# EAGLE board batteryBalancer (EAGLE 8.4.0)
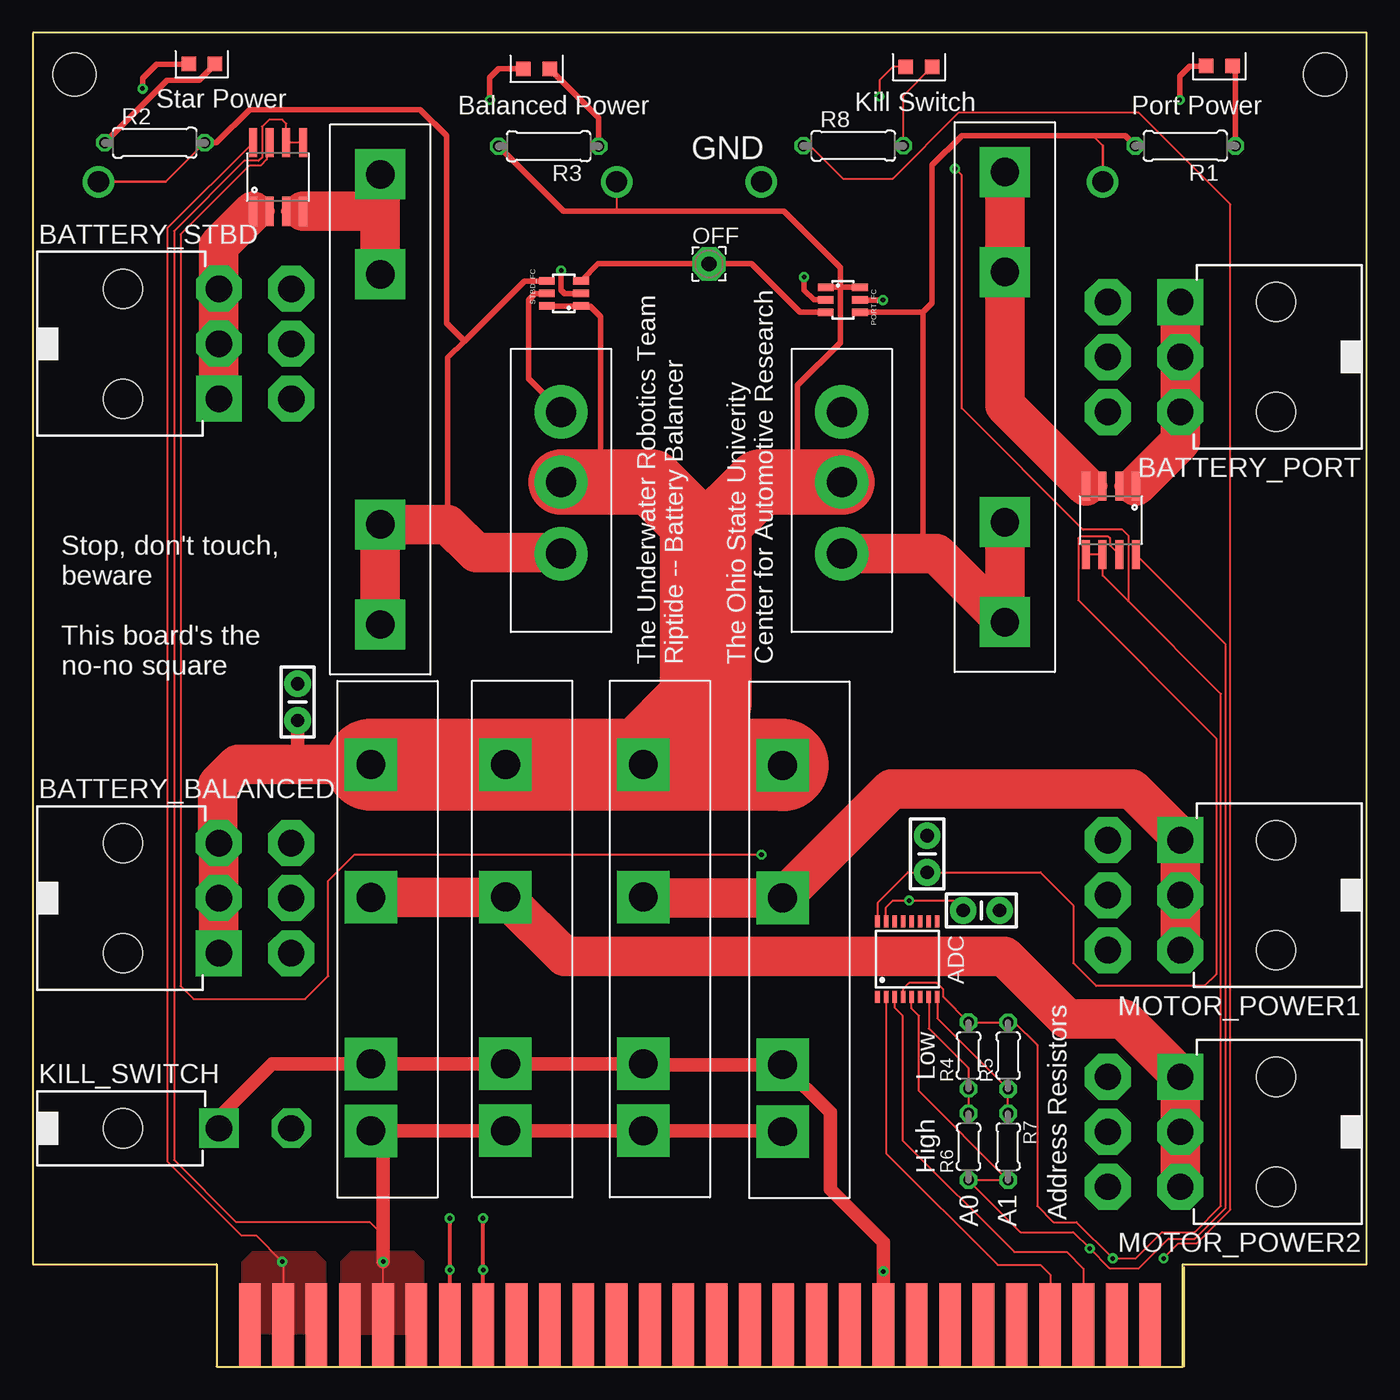
[diagram p0: board, top side]
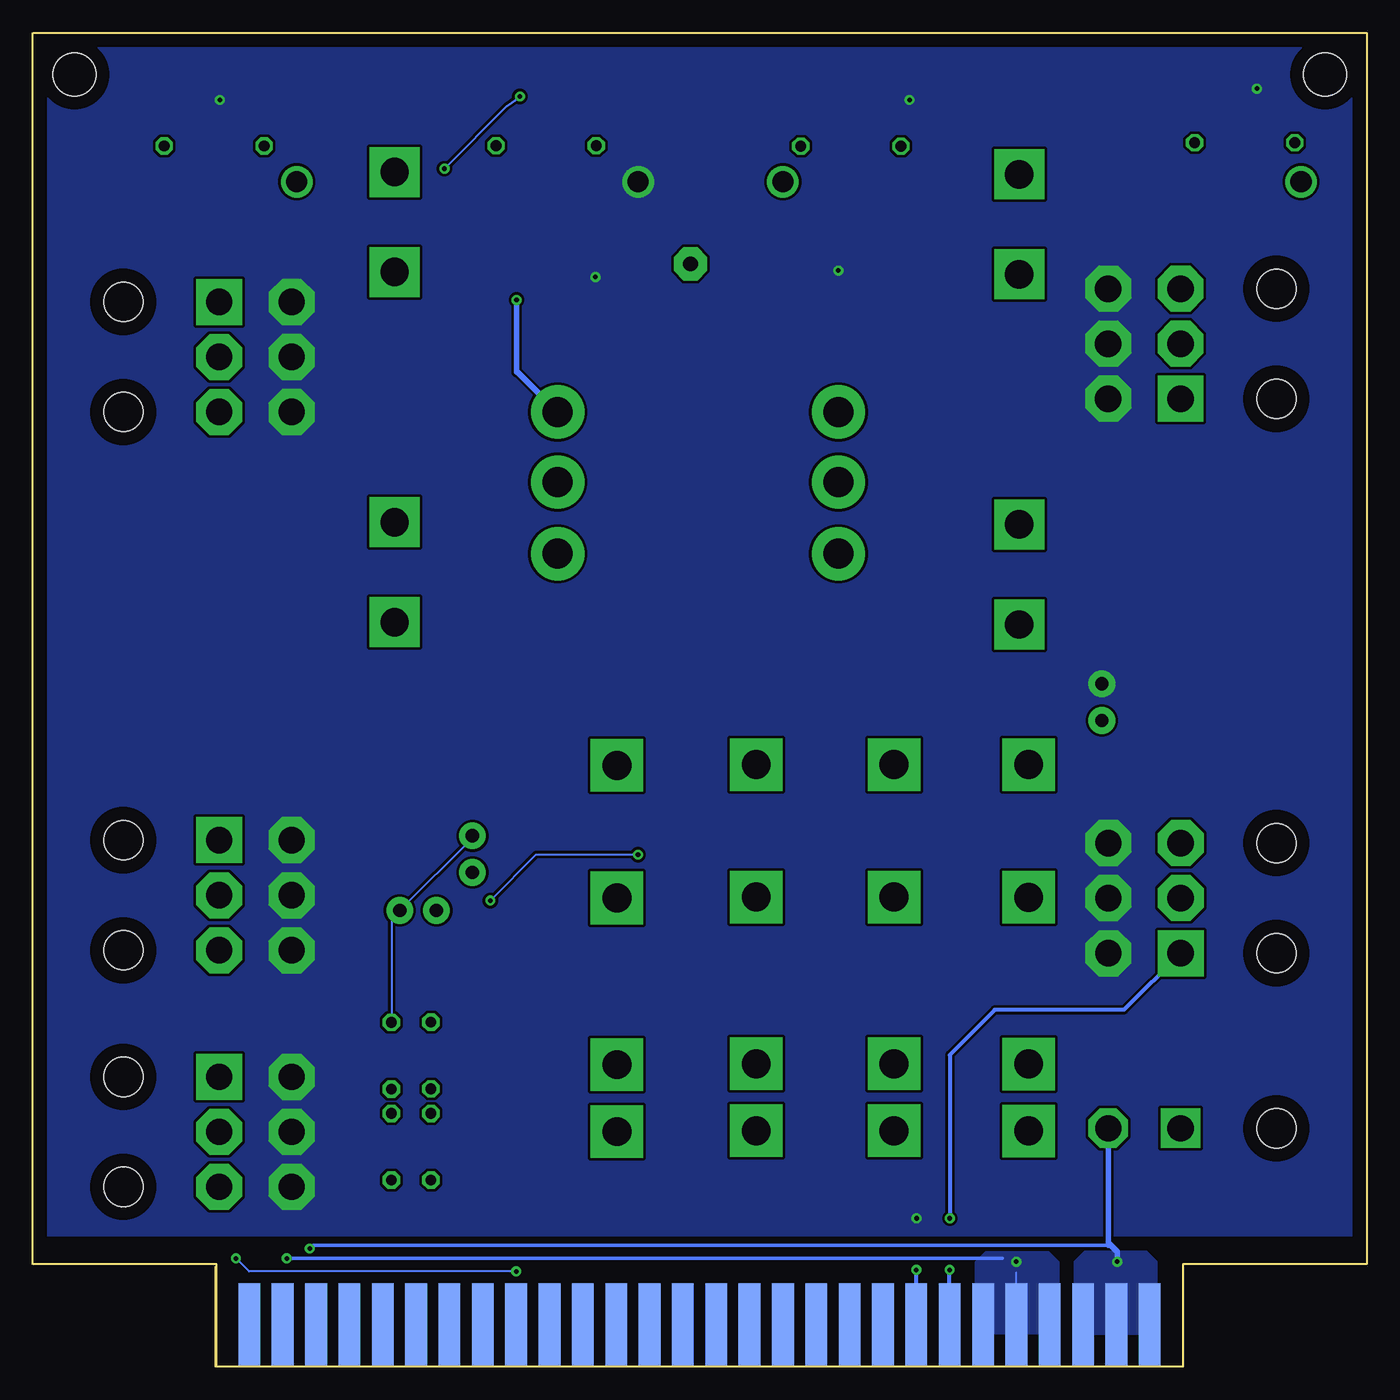
[diagram p1: board, bottom side, seen from below]

Size 101.6 x 101.6 mm. Coordinates in mm from the lower left corner, seen from the top.
Outline: 14,0 87.6,0 87.6,7.8 101.6,7.8 101.6,101.6 0,101.6 0,7.8 14,7.8 14,0
Copper layers (1*16): Top 0.035mm / dielectric 1.5mm / Bottom 0.035mm
Design rules "battery_balancer": minimum track width 6mil, minimum drill 0.35mm, track to track 0.205mm, track to pad 0.205mm, pad to pad 0.205mm, via to via 0.205mm, smd to smd 6mil, copper to edge 40mil, drill to drill 6mil, minimum pad ring 10mil, minimum via ring 8mil, stop-mask expansion 4mil, vias tented up to drill 0mil, thermal gap 10mil
Holes 3.26 mm at 3.17,98.42 98.42,98.42

## Footprints (pad centres in the part's own frame; a part is rotated, then mirrored left to right if it is on the bottom)
TSSOP-16 = smd 0.9 x 0.35: A0 -2.875,-1.625; A1 -2.875,-2.275; GND -2.875,0.325; IN0 2.875,2.275; IN1 2.875,1.625; IN2 2.875,0.975; IN3 2.875,0.325; IN4 2.875,-0.325; IN5 2.875,-0.975; IN6 2.875,-1.625; IN7 2.875,-2.275; INT -2.875,-0.975; SCL -2.875,0.975; SDA -2.875,1.625; V+ -2.875,-0.325; VREF -2.875,2.275
LTST-S270GKT = smd 1.1 x 1.1: ANODE 1,0; CATHODE -1,0
39-30-?06? = drill 2 pad 3.5 square: 1 4.191,0 | drill 2 pad 3.5 octagon: 2 0,0; 3 -4.191,0; 4 4.191,5.512; 5 0,5.512; 6 -4.191,5.512 | hole 3: -4.191,-7.3; 4.191,-7.3
CAP-PTH-SMALL-KIT = drill 1.016 pad 2.032: 1 -1.397,0; 2 1.397,0
5530843-6-BOARDFINGERS = smd 1.651 x 6.35 bottom: 3.3V_4 0.826,3.175; 3.3V_5 3.365,3.175; 3.3V_6 5.905,3.175; EXTRA1 16.066,3.175; EXTRA2 18.605,3.175; EXTRA3 21.145,3.175; EXTRA4 23.686,3.175; EXTRA5 26.226,3.175; EXTRA6 28.765,3.175; EXTRA7 31.305,3.175; EXTRA8 33.846,3.175; EXTRA9 36.386,3.175; EXTRA10 38.925,3.175; EXTRA11 41.465,3.175; EXTRA12 44.005,3.175; EXTRA13 46.545,3.175; EXTRA14 49.086,3.175; EXTRA15 51.626,3.175; EXTRA16 54.166,3.175; EXTRA17 56.706,3.175; EXTRA18 59.245,3.175; EXTRA19 61.785,3.175; EXTRA20 64.326,3.175; EXTRA21 66.865,3.175; EXTRA22 69.406,3.175; GND_4 8.445,3.175; GND_5 10.986,3.175; GND_6 13.525,3.175 | smd 1.651 x 6.35: 3.3VP1 0.826,3.175; 3.3VP2 3.365,3.175; 3.3VP3 5.905,3.175; CAN_H 51.626,3.175; CAN_L 54.166,3.175; EXTRA23 16.066,3.175; EXTRA24 18.605,3.175; EXTRA25 21.145,3.175; EXTRA26 23.686,3.175; EXTRA27 26.226,3.175; EXTRA28 28.765,3.175; EXTRA29 31.305,3.175; EXTRA30 33.846,3.175; EXTRA31 36.386,3.175; EXTRA32 38.925,3.175; EXTRA33 41.465,3.175; EXTRA34 44.005,3.175; EXTRA35 46.545,3.175; GND1 8.445,3.175; GND2 10.986,3.175; GND3 13.525,3.175; KILL_SWITCH 49.086,3.175; SCL_DEPTH 59.245,3.175; SCL_ESC 69.406,3.175; SCL_SENSOR 64.326,3.175; SDA_DEPTH 56.706,3.175; SDA_ESC 66.865,3.175; SDA_SENSOR 61.785,3.175
39-30-?02? = drill 2 pad 3 square: 1 0,0 | drill 2 pad 3 octagon: 2 0,5.512 | hole 3: 0,-7.3
2,54/1,1 = drill 1.118 pad 2.54 octagon: 1 0,0
SOIC-8 = smd 0.61 x 2.21: BW_SEL 0.635,2.616; GND 1.905,2.616; IP+1 -1.905,-2.616; IP+2 -0.635,-2.616; IP-1 0.635,-2.616; IP-2 1.905,-2.616; VCC -1.905,2.616; VIOUT -0.635,2.616
SOT23-6 = smd 0.55 x 1.2: 1 -0.95,-1.3; 2 0,-1.3; 3 0.95,-1.3; 4 0.95,1.3; 5 0,1.3; 6 -0.95,1.3
IXFX64N60P3 = drill 2.286 pad 4.064: DRAIN -1.27,0; GATE -6.604,0; SOURCE 4.191,0
01220083Z = drill 2.159 pad 3.81 square: P$1 -16.51,0; P$2 -8.89,0; P$3 10.16,0; P$4 17.78,0
0207/7 = drill 0.813 octagon: 1 -3.81,0; 2 3.81,0
0204/5 = drill 0.813 octagon: 1 -2.54,0; 2 2.54,0
CMX60D20 = drill 2.2 pad 4 square: CONTROL+ -8.87,0; CONTROL- -13.97,0; LOAD+ 13.93,0; LOAD- 3.83,0
5010_C = drill 1.6 pad 2.286: P$1 0,0

## Placement (x,y rotation side)
ADC  ADC128D818  [TSSOP-16]  66.61,31.04 90 top
BALANCED_STATUS  LTST-S270GKT  [LTST-S270GKT]  38.38,98.86 0 top
BATTERY_BALANCED  39-30-06?  [39-30-?06?]  14.17,35.69 270 top
BATTERY_PORT  39-30-06?  [39-30-?06?]  87.4,76.91 90 top
BATTERY_STBD  39-30-06?  [39-30-?06?]  14.18,77.91 270 top
C1  22uF  [CAP-PTH-SMALL-KIT]  20.18,50.61 270 top
C2  0.1uF  [CAP-PTH-SMALL-KIT]  72.25,34.75 0 top
C3  0.1uF  [CAP-PTH-SMALL-KIT]  68.11,39.04 90 top
EDGE_CONNECTOR  5530843  [5530843-6-BOARDFINGERS]  15.7,0 0 top
KILL_STATUS  LTST-S270GKT  [LTST-S270GKT]  67.5,99 0 top
KILL_SWITCH  39-30-02?  [39-30-?02?]  14.17,18.16 270 top
MOTOR_POWER1  39-30-06?  [39-30-?06?]  87.4,35.91 90 top
MOTOR_POWER2  39-30-06?  [39-30-?06?]  87.4,17.89 90 top
OFF  [2,54/1,1]  51.5,84 0 top
PORT_CS  ACS722  [SOIC-8]  82.11,64.47 180 top
PORT_FC  LM5050-1  [SOT23-6]  61.7,81.26 270 top
PORT_FET  IXFX64N60P3  [IXFX64N60P3]  61.62,66.11 270 top
PORT_FUSE  01220083Z  [01220083Z]  74.04,74.49 270 top
PORT_STATUS  LTST-S270GKT  [LTST-S270GKT]  90.38,99.06 0 top
R1  700  [0207/7]  87.79,92.99 180 top
R2  700  [0207/7]  9.29,93.22 0 top
R3  700  [0207/7]  39.29,92.96 180 top
R4  [0204/5]  71.28,23.7 90 top
R5  [0204/5]  74.29,23.69 90 top
R6  [0204/5]  71.28,16.75 90 top
R7  [0204/5]  74.29,16.75 270 top
R8  700  [0207/7]  62.5,93 0 top
RELAY2  CMX60D20  [CMX60D20]  46.5,31.94 90 top
RELAY3  CMX60D20  [CMX60D20]  36,31.94 90 top
RELAY4  CMX60D20  [CMX60D20]  25.75,31.93 90 top
RLAY1  CMX60D20  [CMX60D20]  57.11,31.88 90 top
STBD_CS  ACS722  [SOIC-8]  18.68,90.61 0 top
STBD_FC  LM5050-1  [SOT23-6]  40.45,81.75 90 top
STBD_FET  IXFX64N60P3  [IXFX64N60P3]  40.24,66.11 270 top
STBD_FUSE  01220083Z  [01220083Z]  26.46,74.31 270 top
STBD_STATUS  LTST-S270GKT  [LTST-S270GKT]  12.88,99.21 0 top
U$1  5010_C  [5010_C]  5,90.25 0 top
U$2  5010_C  [5010_C]  81.5,90.25 0 top
U$3  5010_C  [5010_C]  44.46,90.25 0 top
U$4  5010_C  [5010_C]  55.5,90.25 0 top

## Library data of the parts
ADC = ADC128D818
BALANCED_STATUS KILL_STATUS PORT_STATUS STBD_STATUS = LTST-S270GKT
BATTERY_BALANCED BATTERY_PORT BATTERY_STBD KILL_SWITCH MOTOR_POWER1 MOTOR_POWER2 = con-molex-mini-fit
C1-C3 = SparkFun-Capacitors; PROD_ID: CAP-08370
EDGE_CONNECTOR = 5530843-6
OFF = wirepad
PORT_CS STBD_CS = ACS722
PORT_FC STBD_FC = lio
PORT_FET STBD_FET = IXFX64N60P3
PORT_FUSE STBD_FUSE = 01220083Z
R1-R3 R8 = rcl
R4-R7 = resistor
RELAY2-RELAY4 RLAY1 = CMX60D20
U$1-U$4 = 5010_c

## Nets
3.3V: ADC.V+ EDGE_CONNECTOR.3.3V_4 EDGE_CONNECTOR.3.3V_5 EDGE_CONNECTOR.3.3V_6 EDGE_CONNECTOR.3.3VP1 EDGE_CONNECTOR.3.3VP2 EDGE_CONNECTOR.3.3VP3 KILL_SWITCH.2 PORT_CS.VCC R6.1 R7.2 STBD_CS.VCC
ADC_A0: ADC.A0 R4.1 R6.2
ADC_A1: ADC.A1 R5.1 R7.1
BALANCED_INDICATOR: BALANCED_STATUS.ANODE R3.1
BALANCED_POWER: BATTERY_BALANCED.1 BATTERY_BALANCED.2 BATTERY_BALANCED.3 C1.2 EDGE_CONNECTOR.EXTRA1 EDGE_CONNECTOR.EXTRA23 PORT_FC.1 PORT_FC.6 PORT_FET.DRAIN R3.2 RELAY2.LOAD+ RELAY3.LOAD+ RELAY4.LOAD+ RLAY1.LOAD+ STBD_FC.1 STBD_FC.6 STBD_FET.DRAIN U$3.P$1
GND: BALANCED_STATUS.CATHODE BATTERY_BALANCED.4 BATTERY_BALANCED.5 BATTERY_BALANCED.6 BATTERY_PORT.4 BATTERY_PORT.5 BATTERY_PORT.6 BATTERY_STBD.4 BATTERY_STBD.5 BATTERY_STBD.6 C1.1 EDGE_CONNECTOR.EXTRA2 EDGE_CONNECTOR.EXTRA24 MOTOR_POWER1.4 MOTOR_POWER1.5 MOTOR_POWER1.6 MOTOR_POWER2.4 MOTOR_POWER2.5 MOTOR_POWER2.6 PORT_FC.2 PORT_STATUS.CATHODE STBD_FC.2 STBD_STATUS.CATHODE U$4.P$1
KILL_SWITCH: EDGE_CONNECTOR.KILL_SWITCH KILL_SWITCH.1 R8.1 RELAY2.CONTROL+ RELAY3.CONTROL+ RELAY4.CONTROL+ RLAY1.CONTROL+
LOGIC_GND: ADC.GND C2.2 C3.2 EDGE_CONNECTOR.GND1 EDGE_CONNECTOR.GND2 EDGE_CONNECTOR.GND3 EDGE_CONNECTOR.GND_4 EDGE_CONNECTOR.GND_5 EDGE_CONNECTOR.GND_6 KILL_STATUS.CATHODE PORT_CS.BW_SEL PORT_CS.GND R4.2 R5.2 RELAY2.CONTROL- RELAY3.CONTROL- RELAY4.CONTROL- RLAY1.CONTROL- STBD_CS.BW_SEL STBD_CS.GND
MOTOR_POWER1: MOTOR_POWER1.1 MOTOR_POWER1.2 MOTOR_POWER1.3 RELAY2.LOAD- RLAY1.LOAD-
MOTOR_POWER2: MOTOR_POWER2.1 MOTOR_POWER2.2 MOTOR_POWER2.3 RELAY3.LOAD- RELAY4.LOAD-
N$2: STBD_CS.IP-1 STBD_CS.IP-2 STBD_FUSE.P$1 STBD_FUSE.P$2
N$3: KILL_STATUS.ANODE R8.2
OFF: OFF.1 PORT_FC.3 STBD_FC.3
PORT_CURRENT: ADC.IN0 C3.1 PORT_CS.VIOUT
PORT_GATE: PORT_FC.5 PORT_FET.GATE
PORT_POWER: BATTERY_PORT.1 BATTERY_PORT.2 BATTERY_PORT.3 PORT_CS.IP+1 PORT_CS.IP+2
PORT_SOURCE: PORT_FC.4 PORT_FET.SOURCE PORT_FUSE.P$3 PORT_FUSE.P$4 R1.2 U$2.P$1
PORT_STATUS: PORT_STATUS.ANODE R1.1
PORT_UNBALANCED: PORT_CS.IP-1 PORT_CS.IP-2 PORT_FUSE.P$1 PORT_FUSE.P$2
SCL: ADC.SCL EDGE_CONNECTOR.SCL_SENSOR
SDA: ADC.SDA EDGE_CONNECTOR.SDA_SENSOR
STBD_CURRENT: ADC.IN1 C2.1 STBD_CS.VIOUT
STBD_GATE: STBD_FC.5 STBD_FET.GATE
STBD_POWER: BATTERY_STBD.1 BATTERY_STBD.2 BATTERY_STBD.3 STBD_CS.IP+1 STBD_CS.IP+2
STBD_STATUS: R2.1 STBD_STATUS.ANODE
STBD_UNBALANCED: R2.2 STBD_FC.4 STBD_FET.SOURCE STBD_FUSE.P$3 STBD_FUSE.P$4 U$1.P$1

## Tracks (layer width: path | path; a pad name or v marks a point on that pad's centre or on a via)
3.3V  (via drill 0.35)
  Top 0.152: PORT_CS.VCC 90.86,55.02 90.86,12.1 88.5,9.75 86.5,9.75 84.25,7.5 82,7.5 v80.5,9 79.25,10.25 75.23,10.25 R6.1 R7.2 67.5,21 67.5,26.73 66.93,27.3 ADC.V+ | STBD_CS.VCC 10.25,86.71 10.25,15.62 15.88,10 17,10 v19,8 19.07,7.93 EDGE_CONNECTOR.3.3V_5
  Bottom 0.152: 19.51,9.26 19.5,9.25
  Bottom 0.254: v80.5,9 80.25,9.25 19.68,9.25
  Bottom 0.406: v19,8 19,8.75 19.5,9.25 | 19.5,9.25 19.68,9.25 | 19.5,9.25 19.68,9.44 KILL_SWITCH.2
  pour Bottom (no thermals): 16.75,8.75 21.5,8.75 22.25,8 22.25,2.75 22,2.5 16.25,2.5 16,2.75 16,8
  pour Top (no thermals): 22.25,2.75 22,2.5 16.25,2.5 16,2.75 16,8 16.75,8.75 21.5,8.75 22.25,8
ADC_A0
  Top 0.152: R6.2 R4.1 71.25,21.2 71.25,22.75 68.24,25.76 ADC.A0
ADC_A1
  Top 0.152: ADC.A1 68.89,26.55 R5.1 R7.1
BALANCED_INDICATOR
  Top 0.406: R3.1 43.1,95.14 BALANCED_STATUS.ANODE
BALANCED_POWER  (via drill 0.35)
  Top 0.152: 55.38,69.62 55.38,67.38 | 43.32,67.82 43.75,67.38 | 59.25,67.88 58.75,67.38 | U$3.P$1 44.46,88.01 44.45,88
  Top 0.203: 41.8,80.75 41.77,80.78 STBD_FC.1 | 54.63,69.62 55.38,69.62
  Top 0.305: EDGE_CONNECTOR.EXTRA1 v31.77,7.37 31.77,11.29 v31.75,11.3
  Top 0.406: STBD_FC.1 42.45,80.8 43.25,80 43.25,67.88 43.32,67.82 | STBD_FC.6 39.17,80.78 41.77,80.78 | 61.5,82.21 PORT_FC.1 | 61.5,82.21 PORT_FC.6 | 61.5,82.21 61.5,78 58.25,74.75 58.25,67.88 58.75,67.38 | 61.5,82.21 61.5,83.71 57.21,88 44.45,88 40.44,88 R3.2
  Top 1.016: C1.2 20.18,47.18 21.5,45.85
  Top 3: BATTERY_BALANCED.1 BATTERY_BALANCED.2 BATTERY_BALANCED.3 14.1,39.95 14.1,44.35 15.61,45.85 21.5,45.85 RELAY4.LOAD+
  Top 5: STBD_FET.DRAIN 43.75,67.38 47.12,67.38 51.25,63.25 55.38,67.38 58.75,67.38 PORT_FET.DRAIN
  Top 7: RELAY4.LOAD+ 25.76,45.87 RELAY3.LOAD+ RELAY2.LOAD+ | RELAY2.LOAD+ 57.05,45.87 RLAY1.LOAD+ | RELAY2.LOAD+ 51.25,50.62 51.25,63.25
  Bottom 0.305: BATTERY_BALANCED.1 18.49,27.18 28.32,27.18 31.75,23.75 v31.75,11.3 | EDGE_CONNECTOR.EXTRA1 v31.77,7.37
GND  (via drill 0.35)
  Top 0.305: EDGE_CONNECTOR.EXTRA24 v34.31,7.37 34.31,11.29 v34.29,11.3
  Top 0.406: STBD_FC.2 40.5,81.75 40.25,82 v40.25,83.5 | PORT_FC.2 59.49,81.26 58.75,82 v58.75,83 | PORT_STATUS.CATHODE 88.14,99.06 87.38,98.3 87.38,96.51 v87.35,96.49 | BALANCED_STATUS.CATHODE 35.49,98.86 34.8,98.17 34.8,96.52 v34.83,96.49 | STBD_STATUS.CATHODE 9.42,99.21 8.35,98.14 v8.35,97.35
  Bottom 0.305: EDGE_CONNECTOR.EXTRA24 v34.31,7.37
  pour Bottom (no thermals): 0,101.5 101.5,101.5 101.5,10 0,10
KILL_SWITCH  (via drill 0.35)
  Top 0.152: R8.1 59.19,93 61.69,90.5 65.5,90.5 70.5,95.5 84.25,95.5 91.22,88.53 91.22,11.95 88.65,9.39 87.27,9.39 v86.13,8.25 86.4,8.25
  Top 1.016: EDGE_CONNECTOR.KILL_SWITCH v64.78,7.25 64.78,9.46 60.75,13.5 60.75,19.37 RLAY1.CONTROL+ 46.56,23 RELAY2.CONTROL+ RELAY3.CONTROL+ 35.99,23.05 RELAY4.CONTROL+ 18.23,23.05 14.17,19 KILL_SWITCH.1
  Bottom 0.152: v86.13,8.25 85.13,7.25 v64.78,7.25
LOGIC_GND  (via drill 0.35)
  Top 0.152: 26.5,3.17 EDGE_CONNECTOR.GND_5 v26.69,8 | STBD_CS.GND STBD_CS.BW_SEL 19.31,94.69 19,95 18,95 17.45,94.45 17.45,92.11 17.19,91.84 16.09,91.84 10.75,86.5 10.75,15.75 15.5,11 25.69,11 26.69,10 | ADC.GND 66.29,28.76 66.75,29.22 68.85,29.22 69.34,28.73 69.34,28.18 R4.2 71.3,26.23 R5.2 74.77,26.23 76.5,24.5 76.5,12.25 77.75,11 79.5,11 v82.25,8.25 84,8.25 86,10.25 88.5,10.25 90.5,12.25 90.5,51.25 83.43,58.32 | 83.43,58.32 81.5,60.25 81.5,61.84 PORT_CS.BW_SEL PORT_CS.GND | v70.25,91.25 70.75,90.75 70.75,73 80,63.75 83,63.75 83.43,63.32 83.43,58.32 | KILL_STATUS.CATHODE 65.5,99 64.5,98 v64.5,96.75
  Top 1.016: RLAY1.CONTROL- 57.05,17.97 RELAY2.CONTROL- RELAY3.CONTROL- 27.5,17.97 | 27.5,17.97 25.76,17.97 RELAY4.CONTROL- | v26.69,8 26.69,10 26.69,17.15 27.5,17.97
  Bottom 0.152: EDGE_CONNECTOR.GND_5 26.69,7.19 | v64.5,96.75 65.5,96 v70.25,91.25 | R5.2 74.29,34.11 C2.2 68.11,40.28 C3.2
  Bottom 0.254: 27.75,8.25 v82.25,8.25
  pour Top (no thermals): 23.5,2.75 23.75,2.5 29.25,2.5 29.5,2.5 29.75,2.75 29.75,8 29,8.75 24.25,8.75 23.5,8
  pour Bottom (no thermals): 23.5,2.75 23.75,2.5 29.5,2.5 29.75,2.75 29.75,8 29,8.75 24.5,8.75 24.25,8.75 23.5,8
MOTOR_POWER1
  Top 3: MOTOR_POWER1.3 MOTOR_POWER1.2 MOTOR_POWER1.1 87.4,40.33 83.73,44 65.41,44 RLAY1.LOAD- 46.56,35.7 RELAY2.LOAD-
MOTOR_POWER2
  Top 3: MOTOR_POWER2.3 MOTOR_POWER2.2 MOTOR_POWER2.1 87.4,22.15 83.05,26.5 78.75,26.5 74,31.25 40.49,31.25 35.99,35.76 | 35.99,35.76 RELAY4.LOAD- | 35.99,35.76 RELAY3.LOAD-
N$2
  Top 0.813: STBD_CS.IP-1 STBD_CS.IP-2
  Top 3: 26.46,88 STBD_FUSE.P$1 | 26.46,88 STBD_FUSE.P$2 | STBD_CS.IP-2 26.46,88
N$3
  Top 0.152: R8.2 66.31,96.81 KILL_STATUS.ANODE
OFF
  Top 0.406: STBD_FC.3 43.05,84 OFF.1 54.75,84 58.44,80.31 PORT_FC.3
PORT_CURRENT
  Top 0.152: PORT_CS.VIOUT 82.06,62.54 82.06,63.08 81.9,63.24 79.79,63.24 79.62,63.08 79.62,58.38 90.14,47.86 90.14,29.89 89.25,29 81,29 79.25,30.75 79.25,35.15 76.75,37.65 C3.1 66.65,37.65 64.34,35.34 ADC.IN0
PORT_GATE  (via drill 0.35)
  Top 0.406: PORT_FC.5 63.01,81.25 v64.75,81.25
  Bottom 0.406: v64.75,81.25 64.75,75.75 64.66,75.75 PORT_FET.GATE
PORT_POWER
  Top 0.813: PORT_CS.IP+2 PORT_CS.IP+1
  Top 3: BATTERY_PORT.1 BATTERY_PORT.2 BATTERY_PORT.3 87.4,70.47 PORT_CS.IP+1
PORT_SOURCE
  Top 0.152: 67.81,62.93 68.82,61.92
  Top 0.2: U$2.P$1 81.5,93 80.75,93.75
  Top 0.406: PORT_FC.4 67.81,80.31 | 67.81,80.31 68.5,81 68.5,91.5 70.75,93.75 80.75,93.75 83.22,93.75 R1.2 | 67.81,80.31 67.81,62.48 67.25,61.92
  Top 3: PORT_FUSE.P$3 PORT_FUSE.P$4 68.82,61.92 67.25,61.92 PORT_FET.SOURCE
PORT_STATUS
  Top 0.406: R1.1 91.6,98.84 PORT_STATUS.ANODE
PORT_UNBALANCED
  Top 0.813: PORT_CS.IP-1 PORT_CS.IP-2
  Top 3: PORT_CS.IP-2 74.04,73.26 PORT_FUSE.P$2 PORT_FUSE.P$1
SCL
  Top 0.152: 80,3.2 EDGE_CONNECTOR.SCL_SENSOR 80.03,7.47 78.75,8.75 74.75,8.75 66.25,17.25 66.25,26.75 65.64,27.36 ADC.SCL
SDA
  Top 0.152: 77.5,3.19 EDGE_CONNECTOR.SDA_SENSOR 77.5,3.19 | ADC.SDA 64.99,16.26 73.5,7.75 76.75,7.75 77.5,7 77.5,3.19
STBD_CURRENT  (via drill 0.35)
  Top 0.152: STBD_CS.VIOUT 17.81,93 17.81,91.96 17.34,91.48 16.48,91.48 11.25,86.25 11.25,29 12.25,28 20.75,28 22.5,29.75 22.5,37 24.5,39 v55.5,39 | ADC.IN1 65,33.92 65,35 65.5,35.5 v66.75,35.5 70.1,35.5 C2.1
  Bottom 0.152: v66.75,35.5 63.25,39 v55.5,39
STBD_GATE
  Top 0.406: STBD_FC.5 38.25,81.75 37.75,81.25 37.75,75.25 40.24,72.76 STBD_FET.GATE
STBD_POWER
  Top 0.813: STBD_CS.IP+1 STBD_CS.IP+2
  Top 3: BATTERY_STBD.1 BATTERY_STBD.2 BATTERY_STBD.3 14.18,85.4 STBD_CS.IP+1
STBD_STATUS
  Top 0.406: R2.1 10.25,98 12.66,98 STBD_STATUS.ANODE
STBD_UNBALANCED
  Top 0.2: U$1.P$1 10.12,90.25 R2.2
  Top 0.406: 31.6,64.15 31.6,76.85 32.88,78.12 | STBD_FC.4 37.45,82.7 32.88,78.12 | R2.2 13.97,93.22 16.5,95.75 29.5,95.75 31.5,93.75 31.5,79.5 32.88,78.12
  Top 3: STBD_FUSE.P$4 STBD_FUSE.P$3 31.6,64.15 33.75,62 40.16,62 STBD_FET.SOURCE

## Text on the board
tPlace: Star Power | Kill Switch | Balanced Power | Port Power | GND | The Underwater Robotics Team / Riptide -- Battery Balancer | The Ohio State Univerity / Center for Automotive Research | Stop, don't touch, / beware / / This board's the / no-no square | Low | High | A0 | A1 | Address Resistors